# Altium PCB PCB.pcbdoc (part 1 of 2)
Units mm, origin at the board's own origin, x right, y up, seen from the top; angles counter-clockwise.
Board outline 120.52 x 67.35 mm, 2 copper layers (Top Layer, Bottom Layer); 62 components, 40 nets, 228 pads, 79 vias.
Unrouted connection lines stored in the file: 3.
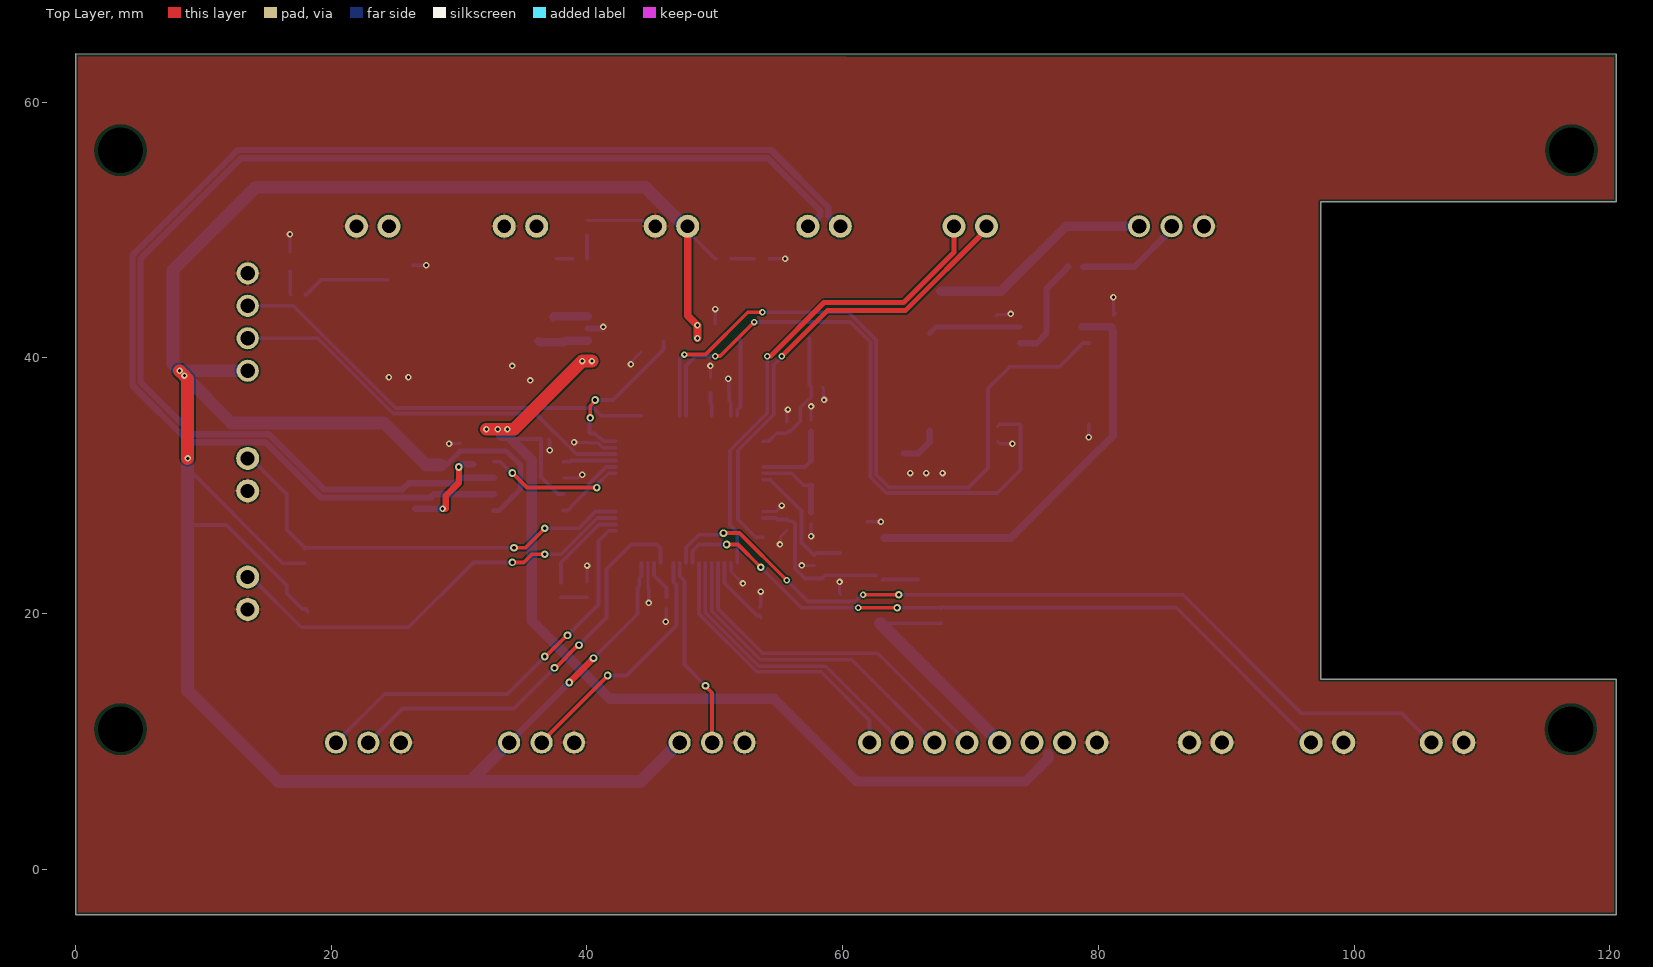
[diagram p0: Top Layer view]
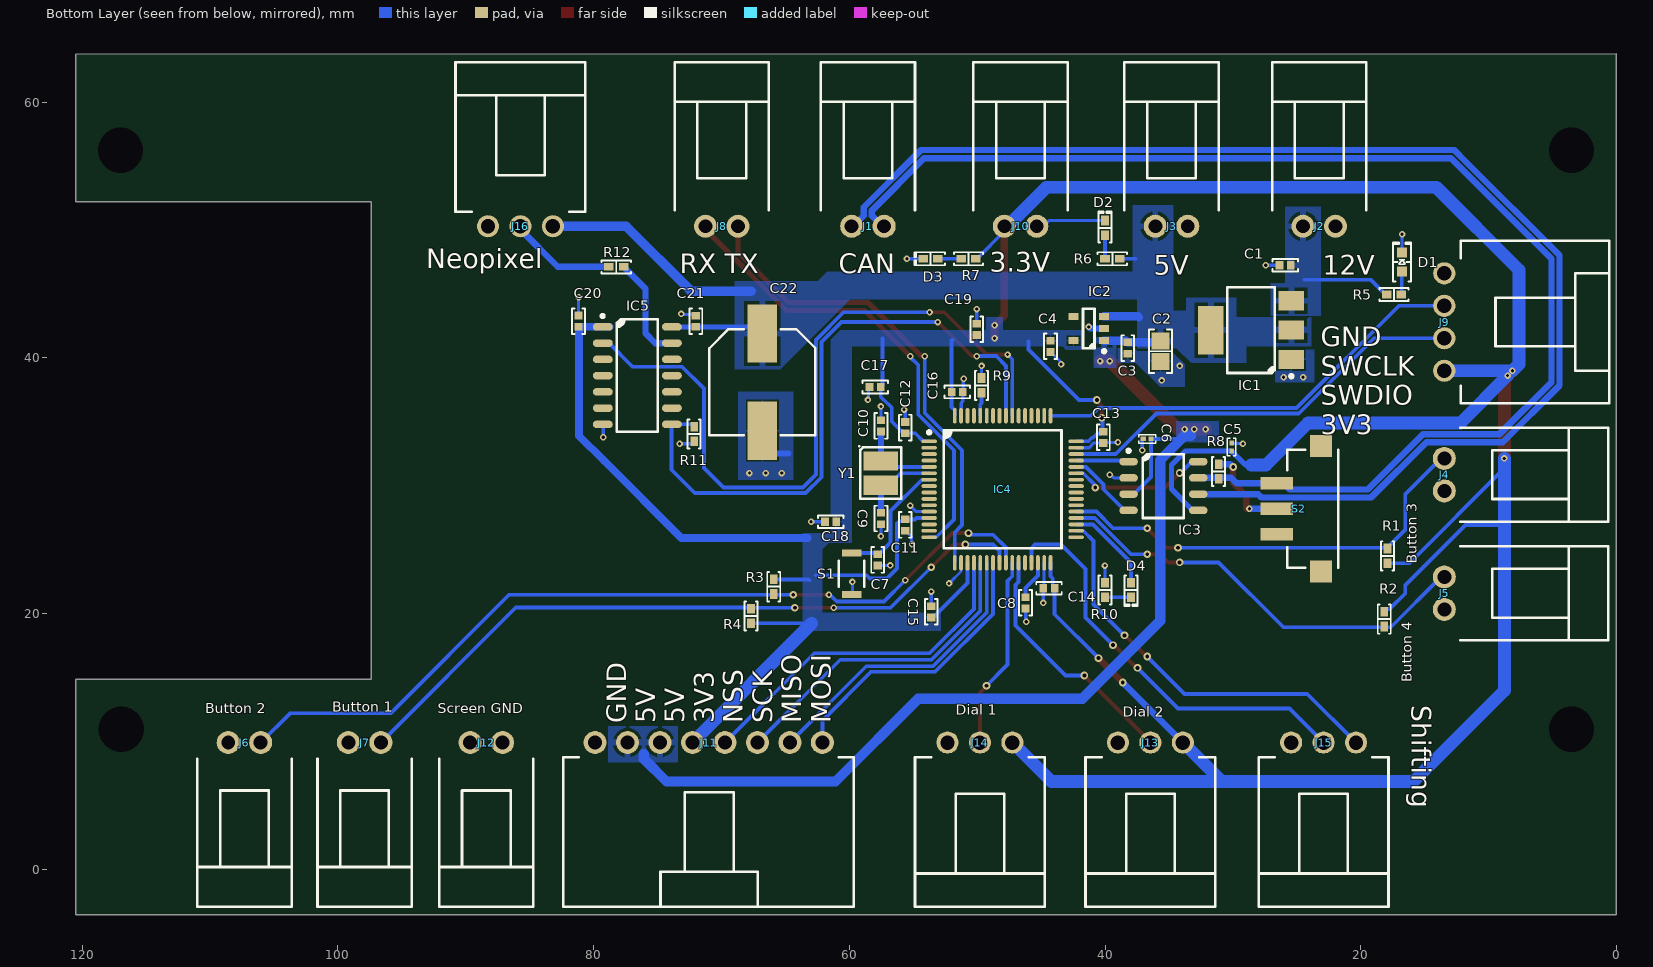
[diagram p1: Bottom Layer view, seen from below]

## Layer stack, top to bottom
Top Solder: solder mask 0.0102, Solder Resist, Dk 3.5
Top Layer: signal copper 0.0356
Dielectric 1: dielectric 0.32, FR-4, Dk 4.8
Bottom Layer: signal copper 0.0356
Bottom Solder: solder mask 0.0102, Solder Resist, Dk 3.5

## Board outline
0,63.796 120.523,63.728 120.523,52.197 97.409,52.197 97.409,14.859 120.523,14.859 120.523,-3.556 0,-3.556

## Design rules (kind name [scope] priority, off if disabled: settings)
BoardOutlineClearance [All] p1: gap=0.2 ignorepadtopadclearanceinfootprint=FALSE
Clearance [All] p1: gap=0.127 ignorepadtopadclearanceinfootprint=TRUE except(0.25: Arc-Hole Track-Hole SMDPad-Hole THPad-Hole Via-Hole Fill-Hole Poly-Hole Region-Hole Text-Hole)
ComponentClearance [All] p1: gap=0.127 collisioncheckmode=3 verticalgap=0.127 showdistances=TRUE
DiffPairsRouting [All] p1: maxlimit=0.254 minlimit=0.127 mostfreqgap=0.127 toplayer_minwidth=0.127 toplayer_maxwidth=25.4 toplayer_prefwidth=0.127 bottomlayer_minwidth=0.127 bottomlayer_maxwidth=25.4 bottomlayer_prefwidth=0.127 substack1={688301AD-FCF4-4EB4-BAFE-FFEB00AE45AE} toplayer_{688301ad-fcf4-4eb4-bafe-ffeb00ae45ae}_minwidth=0.381 toplayer_{688301ad-fcf4-4eb4-bafe-ffeb00ae45ae}_maxwidth=0.381 toplayer_{688301ad-fcf4-4eb4-bafe-ffeb00ae45ae}_prefwidth=0.381 bottomlayer_{688301ad-fcf4-4eb4-bafe-ffeb00ae45ae}_minwidth=0.381 bottomlayer_{688301ad-fcf4-4eb4-bafe-ffeb00ae45ae}_maxwidth=0.381 bottomlayer_{688301ad-fcf4-4eb4-bafe-ffeb00ae45ae}_prefwidth=0.381 substack2={16C61595-261D-4E1B-BAE3-4AC966D508FC} toplayer_{16c61595-261d-4e1b-bae3-4ac966d508fc}_minwidth=0.381 toplayer_{16c61595-261d-4e1b-bae3-4ac966d508fc}_maxwidth=0.381 toplayer_{16c61595-261d-4e1b-bae3-4ac966d508fc}_prefwidth=0.381 bottomlayer_{16c61595-261d-4e1b-bae3-4ac966d508fc}_minwidth=0.381 bottomlayer_{16c61595-261d-4e1b-bae3-4ac966d508fc}_maxwidth=0.381 bottomlayer_{16c61595-261d-4e1b-bae3-4ac966d508fc}_prefwidth=0.381 substack3={7E512655-8A27-4F34-81D1-38BC639BF4BC} toplayer_{7e512655-8a27-4f34-81d1-38bc639bf4bc}_minwidth=0.381 toplayer_{7e512655-8a27-4f34-81d1-38bc639bf4bc}_maxwidth=0.381 toplayer_{7e512655-8a27-4f34-81d1-38bc639bf4bc}_prefwidth=0.381 bottomlayer_{7e512655-8a27-4f34-81d1-38bc639bf4bc}_minwidth=0.381 bottomlayer_{7e512655-8a27-4f34-81d1-38bc639bf4bc}_maxwidth=0.381 bottomlayer_{7e512655-8a27-4f34-81d1-38bc639bf4bc}_prefwidth=0.381 maxuncoupledlength=12.7
Height [All] p1: minheight=0 maxheight=1816.048 prefheight=12.7
HoleSize [All] p1: absolutevalues=TRUE maxlimit=6.3 minlimit=0.254 maxpercent=80.000 minpercent=20.000
HoleToHoleClearance [All] p1: gap=0.25 allowstackedmicrovias=FALSE
MinimumAnnularRing [All] p1: minimumring=0.076
MinimumSolderMaskSliver [All] p1: minsoldermaskwidth=0
PlaneClearance [All] p1: clearance=0.127
PlaneConnect PlaneConnectPowerPads [InPadClass('PowerPads')] p1: planeconnectstyle=Direct reliefexpansion=0.508 reliefentries=4 reliefconductorwidth=0.254 reliefairgap=0.254
PlaneConnect [All] p2: pad.planeconnectstyle=Relief pad.reliefexpansion=0.3 pad.reliefentries=4 pad.reliefconductorwidth=0.127 pad.reliefairgap=0.127 via.planeconnectstyle=Direct via.reliefexpansion=0.3 via.reliefentries=4 via.reliefconductorwidth=0.127 via.reliefairgap=0.127
PolygonConnect PolygonConnectPowerPads [All vs InNet('VCC12V') or InNet('VCC5V')] p1: thpad.connectstyle=Relief thpad.reliefconductorwidth=0.5 thpad.reliefentries=4 thpad.polygonreliefangle="90 Angle" thpad.airgapwidth=0.254 smdpad.connectstyle=Relief smdpad.reliefconductorwidth=0.5 smdpad.reliefentries=4 smdpad.polygonreliefangle="90 Angle" smdpad.airgapwidth=0.254 via.connectstyle=Direct via.reliefconductorwidth=0.254 via.reliefentries=4 via.polygonreliefangle="90 Angle" via.airgapwidth=0.254
PolygonConnect [All] p2: thpad.connectstyle=Relief thpad.reliefconductorwidth=0.25 thpad.reliefentries=4 thpad.polygonreliefangle="90 Angle" thpad.airgapwidth=0.127 smdpad.connectstyle=Relief smdpad.reliefconductorwidth=0.127 smdpad.reliefentries=4 smdpad.polygonreliefangle="90 Angle" smdpad.airgapwidth=0.127 via.connectstyle=Direct via.reliefconductorwidth=0.127 via.reliefentries=4 via.polygonreliefangle="90 Angle" via.airgapwidth=0.127
RoutingVias [All] p1: holewidth=0.3 width=0.6 viastyle="Through Hole" minholewidth=0.254 minwidth=0.508 maxholewidth=0.6 maxwidth=6.6
SilkToSilkClearance [All] p1: silktosilkclearance=0
SilkToSolderMaskClearance [IsPad] p1: minsilkscreentomaskgap=0.1 clearancetoexposedcopper=TRUE
SolderMaskExpansion [All] p1: expansion=0.075 istentingtop=FALSE
Width [All] p1: maxlimit=25.4 minlimit=0.127 preferedwidth=0.127 substack1={688301AD-FCF4-4EB4-BAFE-FFEB00AE45AE} substack2={16C61595-261D-4E1B-BAE3-4AC966D508FC} substack3={7E512655-8A27-4F34-81D1-38BC639BF4BC} minimp=50.000000 maximp=50.000000 favimp=50.000000
20 further rules are at their usual default settings.

## Classes and differential pairs
component class Power: C1 C2 C3 C4 D1 D2 D3 IC1 IC2 R5 R6 R7
component class Neopixel: C20 C21 C22 IC5 J16 R11 R12
component class MCU: C7 C8 C9 C10 C11 C12 C13 C14 C15 C16 C17 C18 C19 D4 IC4 J8 J9 R9 R10 S1 Y1
component class Connectors: J1 J2 J3 J4 J5 J6 J7 J10 J11 J12 J13 J14 J15 R1 R2 R3 R4
component class CAN: C5 C6 IC3 R8 S2
differential pair CAN1: +CAN1_P -CAN1_N

## Components (designator, comment, footprint, x,y, rotation, side; value= is the part's Value field where it differs from the comment)
C1 "0.1µF" "CAP 0402_1005" 25.908,47.244 r180 bottom
C2 "10µF" "CAP 0805_2012" 35.651,40.513 r90 bottom
C3 "1µF" "CAP 0402_1005" 38.227,40.767 r90 bottom
C4 "1µF" "CAP 0402_1005" 44.262,40.894 r90 bottom
C5 "0.1µF" "CAP 0201_0603" 30.099,33.02 r270 bottom
C6 "0.1µF" "CAP 0201_0603" 36.703,33.655 r180 bottom
C7 "0.1µF" "CAP 0402_1005" 57.785,24.189 r90 bottom
C8 "2.2µF" "CAP 0402_1005" 46.228,20.828 r270 bottom
C9 "8pF" "CAP 0402_1005" 57.531,27.432 r90 bottom
C10 "8pF" "CAP 0402_1005" 57.531,34.671 r270 bottom
C11 "0.1µF" "CAP 0402_1005" 55.626,26.924 r90 bottom
C12 "0.1µF" "CAP 0402_1005" 55.626,34.544 r270 bottom
C13 "0.1µF" "CAP 0402_1005" 40.132,33.782 r90 bottom
C14 "0.1µF" "CAP 0402_1005" 44.382,21.971 r180 bottom
C15 "0.1µF" "CAP 0402_1005" 53.594,20.125 r270 bottom
C16 "0.1µF" "CAP 0402_1005" 51.562,37.338 r0 bottom
C17 "1µF" "CAP 0402_1005" 57.98,37.719 r180 bottom
C18 "1µF" "CAP 0402_1005" 61.468,27.178 r180 bottom
C19 "4.7µF" "CAP 0402_1005" 50.038,42.232 r270 bottom
C20 "0.1µF" "CAP 0402_1005" 81.183,42.867 r270 bottom
C21 "0.1µF" "CAP 0402_1005" 72.009,42.858 r270 bottom
C22 "1000µF" "CAP ALSMD 8.3MM H10.5MM" 66.802,38.1 r270 bottom
D1 "Red" "LED 0603_1608 RED" 16.764,47.498 r90 bottom
D2 "Green" "LED 0402_1005 GREEN" 40.005,50.165 r90 bottom
D3 "Yellow" "LED 0402_1005 YELLOW" 53.654,47.752 r0 bottom
D4 "Blue" "LED 0402_1005 BLUE" 37.973,21.844 r270 bottom
IC1 "LD1117S50TR" "ST SOT-223" 28.575,42.164 r0 bottom
IC2 "AP2112K-3.3TRG1" "DIODES SOT-23-5 W5" 41.275,42.291 r0 bottom
IC3 "MCP2542FDT-E/SN" "MICROCHIP SOIC-8 150MIL WIDE" 35.433,29.972 r180 bottom
IC4 "STM32F446RET7" "ST LQFP-64 10X10MM" 48.006,29.718 r180 bottom
IC5 "TXB0104DR" "TI SOIC-14 D" 76.581,38.608 r180 bottom
J1 "0705530106" "MOLEX SDA-70553-2PIN" 58.547,56.261 r180 bottom
J2 "0705530106" "MOLEX SDA-70553-2PIN" 23.241,56.261 r180 bottom
J3 "0705530106" "MOLEX SDA-70553-2PIN" 34.798,56.261 r180 bottom
J4 "0705530106" "MOLEX SDA-70553-2PIN" 7.493,30.861 r270 bottom
J5 "0705530106" "MOLEX SDA-70553-2PIN" 7.493,21.59 r270 bottom
J6 "0705530106" "MOLEX SDA-70553-2PIN" 107.315,3.937 r0 bottom
J7 "0705530106" "MOLEX SDA-70553-2PIN" 97.917,3.937 r0 bottom
J8 "0705530106" "MOLEX SDA-70553-2PIN" 69.977,56.261 r180 bottom
J9 "0705530003" "MOLEX SDA-70553-4PIN" 7.239,42.799 r270 bottom
J10 "0705530106" "MOLEX SDA-70553-2PIN" 46.609,56.261 r180 bottom
J11 "0705530007" "MOLEX SDA-70553-8PIN" 71,3.683 r0 bottom
J12 "0705530106" "MOLEX SDA-70553-2PIN" 88.392,3.937 r0 bottom
J13 "0705530002" "MOLEX SDA-70553-3PIN" 36.449,3.683 r0 bottom
J14 "0705530002" "MOLEX SDA-70553-3PIN" 49.784,3.683 r0 bottom
J15 "0705530002" "MOLEX SDA-70553-3PIN" 22.907,3.683 r0 bottom
J16 "0705530002" "MOLEX SDA-70553-3PIN" 85.725,56.515 r180 bottom
R1 "10 kOhms" "RES 0402_1005" 17.907,24.511 r270 bottom
R2 "10 kOhms" "RES 0402_1005" 18.161,19.558 r90 bottom
R3 "10 kOhms" "RES 0402_1005" 65.913,22.098 r90 bottom
R4 "10 kOhms" "RES 0402_1005" 67.691,19.812 r270 bottom
R5 "1.8 kOhms" "RES 0402_1005" 17.399,44.958 r180 bottom
R6 "340 Ohms" "RES 0402_1005" 39.43,47.752 r180 bottom
R7 "220 Ohms" "RES 0402_1005" 50.673,47.752 r180 bottom
R8 "120 Ohms" "RES 0402_1005" 31.115,31.115 r90 bottom
R9 "10 kOhms" "RES 0402_1005" 49.657,37.846 r270 bottom
R10 "220 Ohms" "RES 0402_1005" 40.005,21.844 r90 bottom
R11 "10 kOhms" "RES 0402_1005" 72.136,34.036 r90 bottom
R12 "470 Ohms" "RES 0402_1005" 78.232,47.117 r0 bottom
S1 "KXT341 LHS" "C&K KXT3" 59.817,23.114 r90 bottom
S2 "SS312SAH4" "NKK SS312SAH4" 23.749,28.194 r0 bottom
Y1 "8MHz" "NDK NX3225GD" 57.531,30.988 r270 bottom

## Footprints (in the part's own frame and the unit in brackets; to place one, negate y for a bottom-side part, rotate by r counter-clockwise, add the part's x,y. Pads: shape width x height; smd on the part's side, far side on the other; paste and mask are expansions set on the pad)
"C&K KXT3" [mm]
  rect 0.55x1.5 smd: 1(-1.625,0) 2(1.625,0)
  silkscreen extent -1,-1 1,1, body extent -1.75,-1 1.75,1, height 0.58
"CAP 0201_0603" [mm] "Chip Capacitor, 2-Leads, Body 0.60x0.30mm, IPC Medium Density"
  rect 0.4x0.35 smd: 1(-0.31,0) 2(0.31,0)
  silkscreen extent -0.67,-0.33 0.67,0.33, body extent -0.3,-0.15 0.3,0.15, height 0.3
"CAP 0402_1005" [mm] "Chip Capacitor, 2-Leads, Body 1.02x0.51mm, IPC Medium Density"
  rect 0.6x0.64 smd: 1(-0.44,0) 2(0.44,0)
  silkscreen extent -1,-0.5 1,0.5, body extent -0.5,-0.26 0.5,0.26, height 0.52
"CAP 0805_2012" [mm] "Chip Capacitor, 2-Leads, Body 2.00x1.20mm, IPC Medium Density"
  rect 1.3x1.4 smd: 1(-0.8,0) 2(0.8,0)
  silkscreen extent -1.7,-0.9 1.7,0.9, body extent -1,-0.64 1,0.64, height 1.26
"CAP ALSMD 8.3MM H10.5MM" [mm] "Aluminum Electrolytic Capacitor, Body 8.30x8.30x10.50mm, IPC Low Density"
  rect 4.55x2.3 smd: 1(-3.8,0) 2(3.8,0)
  silkscreen extent -4.15,-4.15 4.15,4.15, body extent -4.95,-4.15 4.95,4.15, height 10.5
"DIODES SOT-23-5 W5" [mm] "SOT23, 5-Leads, Body 3.00x2.85mm, Pitch 0.95mm, IPC Medium Density"
  rect 0.8x0.55 smd: 1(-1.2,0.95) 2(-1.2,0) 3(-1.2,-0.95) 4(1.2,-0.95) 5(1.2,0.95)
  silkscreen extent -1.32,-1.55 0.45,1.9, body extent -1.41,-1.45 1.41,1.45, height 1.5
"LED 0402_1005 BLUE" [mm] "Chip Diode, 2-Leads, Body 1.00x0.50mm, IPC Medium Density"
  rect 0.75x0.6 smd: 1(-0.575,0) 2(0.575,0)
  silkscreen extent -1.14,-0.51 1.27,0.51, body extent -0.5,-0.25 0.5,0.25, height 0.21
"LED 0402_1005 GREEN" [mm] "Chip Diode, 2-Leads, Body 1.00x0.50mm, IPC Medium Density"
  rect 0.75x0.6 smd: 1(-0.575,0) 2(0.575,0)
  silkscreen extent -1.14,-0.51 1.27,0.51, body extent -0.5,-0.25 0.5,0.25, height 0.21
"LED 0402_1005 YELLOW" [mm] "Chip Diode, 2-Leads, Body 1.00x0.50mm, IPC Medium Density"
  rect 0.75x0.6 smd: 1(-0.575,0) 2(0.575,0)
  silkscreen extent -1.14,-0.51 1.27,0.51, body extent -0.5,-0.25 0.5,0.25, height 0.21
"LED 0603_1608 RED" [mm] "Chip Diode, 2-Leads, Body 1.60x0.80mm, IPC Medium Density"
  rect 0.8x0.8 smd: 1(-0.75,0) 2(0.75,0)
  silkscreen extent -1.52,-0.7 1.52,0.7, body extent -0.8,-0.4 0.8,0.4, height 0.53
"MICROCHIP SOIC-8 150MIL WIDE" [mm] "SOIC, 8-Leads, Body 4.90x3.90mm, Pitch 1.27mm, IPC Medium Density"
  oval 1.45x0.6 smd: 1(-2.725,1.905) 2(-2.725,0.635) 3(-2.725,-0.635) 4(-2.725,-1.905) 5(2.725,-1.905) 6(2.725,-0.635) 7(2.725,0.635) 8(2.725,1.905)
  silkscreen extent -2.85,-2.5 1.6,2.88, body extent -3.01,-2.45 3.01,2.45, height 1.5
"MOLEX SDA-70553-2PIN" [mm] "SL Right angle header with latch, 0.100 centres, SDA-70553"
  round 1.8 hole 1.09: 1(-1.27,-5.969) 2(1.27,-5.969)
  silkscreen extent -3.68,-4.72 3.68,6.86, body extent -3.68,-6.72 3.68,6.87, height 6.96
"MOLEX SDA-70553-3PIN" [mm] "SL Right Angle Header W/LAtch & Trip-Pegs 2.54mm Centres"
  round 1.73 hole 1.13: 1(-2.54,-6.223) 2(0,-6.223) 3(2.54,-6.223)
  silkscreen extent -5.08,-5.08 5.08,6.6, body extent -5.08,-6.92 5.08,6.67, height 6.98
"MOLEX SDA-70553-4PIN" [mm] "SL Right Angle Header W/LAtch & Trip-Pegs 2.54mm Centres"
  round 1.73 hole 1.13: 1(-3.81,-6.223) 2(-1.27,-6.223) 3(1.27,-6.223) 4(3.81,-6.223)
  silkscreen extent -6.35,-4.95 6.35,6.68, body extent -6.35,-6.92 6.35,6.67, height 6.98
"MOLEX SDA-70553-8PIN" [mm] "SL Right angle header with latch, 0.100 centres, SDA-70553"
  round 1.8 hole 1.09: 1(-8.89,-6.223) 2(-6.35,-6.223) 3(-3.81,-6.223) 4(-1.27,-6.223) 5(1.27,-6.223) 6(3.81,-6.223) 7(6.35,-6.223) 8(8.89,-6.223)
  silkscreen extent -11.34,-5.08 11.39,6.6, body extent -11.39,-6.97 11.47,6.62, height 6.96
"NDK NX3225GD" [mm] "Crystal, 2-Leads, Body 2.50x3.20mm"
  rect 1.5x2.7 smd: 1(-0.95,0) 2(0.95,0)
  silkscreen extent -2.15,-1.75 2,1.6, body extent -1.6,-1.25 1.6,1.25, height 1
"NKK SS312SAH4" [mm]
  rect 2.55x1 smd: 1(2.825,-2) 2(2.825,0) 3(2.825,2)
  rect 1.7x1.7 smd: M(-0.65,-4.9) M(-0.65,4.9)
  silkscreen extent -2,-4.6 2,4.6, body extent -3.98,-5.25 3.42,5.25, height 2.9
"RES 0402_1005" [mm] "Chip Resistor, 2-Leads, Body 1.0x0.5mm, IPC Medium Density"
  rect 0.75x0.6 smd: 1(-0.575,0) 2(0.575,0)
  silkscreen extent -1.14,-0.51 1.14,0.51, body extent -0.5,-0.25 0.5,0.25, height 0.35
"ST LQFP-64 10X10MM" [mm] "LQFP, 64-Leads, Body 10.00x10.00mm, Pitch 0.50mm, IPC Medium Density"
  oval 1.2x0.3 smd: 1(-5.75,3.75) 2(-5.75,3.25) 3(-5.75,2.75) 4(-5.75,2.25) 5(-5.75,1.75) 6(-5.75,1.25) 7(-5.75,0.75) 8(-5.75,0.25) 9(-5.75,-0.25) 10(-5.75,-0.75) 11(-5.75,-1.25) 12(-5.75,-1.75) 13(-5.75,-2.25) 14(-5.75,-2.75) 15(-5.75,-3.25) 16(-5.75,-3.75) 33(5.75,-3.75) 34(5.75,-3.25) 35(5.75,-2.75) 36(5.75,-2.25) 37(5.75,-1.75) 38(5.75,-1.25) 39(5.75,-0.75) 40(5.75,-0.25) 41(5.75,0.25) 42(5.75,0.75) 43(5.75,1.25) 44(5.75,1.75) 45(5.75,2.25) 46(5.75,2.75) 47(5.75,3.25) 48(5.75,3.75)
  oval 0.3x1.2 smd: 17(-3.75,-5.75) 18(-3.25,-5.75) 19(-2.75,-5.75) 20(-2.25,-5.75) 21(-1.75,-5.75) 22(-1.25,-5.75) 23(-0.75,-5.75) 24(-0.25,-5.75) 25(0.25,-5.75) 26(0.75,-5.75) 27(1.25,-5.75) 28(1.75,-5.75) 29(2.25,-5.75) 30(2.75,-5.75) 31(3.25,-5.75) 32(3.75,-5.75) 49(3.75,5.75) 50(3.25,5.75) 51(2.75,5.75) 52(2.25,5.75) 53(1.75,5.75) 54(1.25,5.75) 55(0.75,5.75) 56(0.25,5.75) 57(-0.25,5.75) 58(-0.75,5.75) 59(-1.25,5.75) 60(-1.75,5.75) 61(-2.25,5.75) 62(-2.75,5.75) 63(-3.25,5.75) 64(-3.75,5.75)
  silkscreen extent -5.88,-4.6 4.6,4.6, body extent -6.01,-6.01 6.01,6.01, height 1.6
"ST SOT-223" [mm] "SOT223, 4-Leads, Body 6.50x7.00mm (avg), Pitch 2.30mm, IPC Medium Density"
  rect 2x1.5 smd: 1(-3.15,2.3) 2(-3.15,0) 3(-3.15,-2.3)
  rect 2x3.8 smd: 4(3.15,0)
  silkscreen extent -3.27,-3.35 1.85,3.72, body extent -3.52,-3.25 3.5,3.25, height 1.8
"TI SOIC-14 D" [mm] "SOP, 14-Leads, Body 8.65x3.90mm, Pitch 1.27mm, IPC Medium Density"
  oval 1.55x0.6 smd: 1(-2.7,3.81) 2(-2.7,2.54) 3(-2.7,1.27) 4(-2.7,0) 5(-2.7,-1.27) 6(-2.7,-2.54) 7(-2.7,-3.81) 8(2.7,-3.81) 9(2.7,-2.54) 10(2.7,-1.27) 11(2.7,0) 12(2.7,1.27) 13(2.7,2.54) 14(2.7,3.81)
  silkscreen extent -2.85,-4.4 1.6,4.78, body extent -3.01,-4.32 3.01,4.32, height 1.65

## Part data
C1: library part CGA2B3X5R1H104M050BB, "CAP CER 0.1UF 50V X5R 0402", Device Package="0402 (1005 Metric)", Manufacturer="TDK Corporation", Operating temperature="-55°C ~ 85°C", Ratings=AEC-Q200, Supplier Part Number 1=445-12214-1-ND, Temperature Coefficient=X5R, Tolerance=±20%, Voltage - Rated=50V, Applications=Automotive, Capacitance=0.1µF, ComponentLink1Description=Datasheet, ComponentLink1URL=https://product.tdk.com/info/en/catalog/datasheets/mlcc_automotive_general_en.pdf?ref_disty=digikey, ComponentLink2Description="DigiKey Link", ComponentLink2URL=http://digikey.com/product-detail/en/tdk-corporation/CGA2B3X5R1H104M050BB/445-12214-1-ND/3953880, LastUpdated="2020-09-02 1:02:25 AM", Lifecycle Status=Active, Minimum Order=1, Mounting Type="Surface Mount, MLCC", Package / Case="0402 (1005 Metric)", Packaging=TapeAndReel, Part Number=CGA2B3X5R1H104M050BB, Part Status=Active, PartId=1792, Price=0.02, Series=CGA, Size / Dimension="0.039\" L x 0.020\" W (1.00mm x 0.50mm)", Supplier 1=DigiKey, Thickness (Max)="0.022\" (0.55mm)"
C2: library part GRM21BC81E106ME51L, "CAP CER 10UF 25V X6S 0805", Device Package="0805 (2012 Metric)", Manufacturer="Murata Electronics", Operating temperature="-55°C ~ 105°C", Supplier Part Number 1=490-10503-1-ND, Temperature Coefficient=X6S, Tolerance=±20%, Voltage - Rated=25V, Applications="General Purpose", Capacitance=10µF, ComponentLink1Description=Datasheet, ComponentLink1URL=https://search.murata.co.jp/Ceramy/image/img/A01X/G101/ENG/GRM21BC81E106ME51-01.pdf, ComponentLink2Description="DigiKey Link", ComponentLink2URL=http://digikey.com/product-detail/en/murata-electronics/GRM21BC81E106ME51L/490-10503-1-ND/5026431, LastUpdated="2020-09-02 1:04:38 AM", Lifecycle Status=Active, Minimum Order=1, Mounting Type="Surface Mount, MLCC", Package / Case="0805 (2012 Metric)", Packaging=TapeAndReel, Part Number=GRM21BC81E106ME51L, Part Status=Active, PartId=4560, Price=0.07, Series=GRM, Size / Dimension="0.079\" L x 0.049\" W (2.00mm x 1.25mm)", Supplier 1=DigiKey, Thickness (Max)="0.055\" (1.40mm)"
C3 C4: library part 0402ZD105KAT4A, "CAP CER 1UF 10V X5R 0402", Device Package="0402 (1005 Metric)", Manufacturer="AVX Corporation", Operating temperature="-55°C ~ 85°C", Supplier Part Number 1=478-10063-1-ND, Temperature Coefficient=X5R, Tolerance=±10%, Voltage - Rated=10V, Applications="General Purpose", Capacitance=1µF, ComponentLink1Description=Datasheet, ComponentLink1URL=http://datasheets.avx.com/cx5r.pdf, ComponentLink2Description="DigiKey Link", ComponentLink2URL=http://digikey.com/product-detail/en/avx-corporation/0402ZD105KAT4A/478-10063-1-ND/6564285, LastUpdated="2020-09-02 1:02:25 AM", Lifecycle Status=Active, Minimum Order=1, Mounting Type="Surface Mount, MLCC", Package / Case="0402 (1005 Metric)", Packaging=TapeAndReel, Part Number=0402ZD105KAT4A, Part Status=Active, PartId=1846, Price=0.02, Series=-, Size / Dimension="0.039\" L x 0.020\" W (1.00mm x 0.50mm)", Supplier 1=DigiKey, Thickness (Max)="0.022\" (0.56mm)"
C5 C6: library part EMK063BJ104KP-F, "CAP CER 0.1UF 16V X5R 0201", Device Package="0201 (0603 Metric)", Manufacturer="Taiyo Yuden", Operating temperature="-55°C ~ 85°C", Supplier Part Number 1=587-5833-1-ND, Temperature Coefficient=X5R, Tolerance=±10%, Voltage - Rated=16V, Applications="General Purpose", Capacitance=0.1µF, ComponentLink1Description=Datasheet, ComponentLink1URL="https://ds.yuden.co.jp/TYCOMPAS/ut/detail?pn=EMK063BJ104KP-F  &u=M", ComponentLink2Description="DigiKey Link", ComponentLink2URL=http://digikey.com/product-detail/en/taiyo-yuden/EMK063BJ104KP-F/587-5833-1-ND/7674954, LastUpdated="2020-09-02 1:00:18 AM", Lifecycle Status=Active, Minimum Order=1, Mounting Type="Surface Mount, MLCC", Package / Case="0201 (0603 Metric)", Packaging=TapeAndReel, Part Number=EMK063BJ104KP-F, Part Status=Active, PartId=12, Price=0.02, Series=M, Size / Dimension="0.024\" L x 0.012\" W (0.60mm x 0.30mm)", Supplier 1=DigiKey, Thickness (Max)="0.013\" (0.33mm)"
C7 C11 C12 C13 C14 C15 C16 C20 C21: library part C0402C104K4RECAUTO, "CAP CER 0402 0.1UF 16V X7R 10%", Device Package="0402 (1005 Metric)", Manufacturer=KEMET, Operating temperature="-55°C ~ 125°C", Ratings=AEC-Q200, Supplier Part Number 1=399-17167-1-ND, Temperature Coefficient=X7R, Tolerance=±10%, Voltage - Rated=16V, Applications="Automotive, ESD Protection", Capacitance=0.1µF, ComponentLink1Description=Datasheet, ComponentLink1URL=https://api.kemet.com/component-edge/download/datasheet/C0402C104K4RECAUTO.pdf, ComponentLink2Description="DigiKey Link", ComponentLink2URL=http://digikey.com/product-detail/en/kemet/C0402C104K4RECAUTO/399-17167-1-ND/8563708, LastUpdated="2020-09-02 1:02:25 AM", Lifecycle Status=Active, Minimum Order=1, Mounting Type="Surface Mount, MLCC", Package / Case="0402 (1005 Metric)", Packaging=TapeAndReel, Part Number=C0402C104K4RECAUTO, Part Status=Active, PartId=1731, Price=0.02, Series="ESD SMD Auto X7R", Size / Dimension="0.039\" L x 0.020\" W (1.00mm x 0.50mm)", Supplier 1=DigiKey, Thickness (Max)="0.022\" (0.55mm)"
C8: library part CL05A225KO5NQNC, "CAP CER 2.2UF 16V X5R 0402", Device Package="0402 (1005 Metric)", Manufacturer="Samsung Electro-Mechanics", Operating temperature="-55°C ~ 85°C", Supplier Part Number 1=1276-1461-1-ND, Temperature Coefficient=X5R, Tolerance=±10%, Voltage - Rated=16V, Applications="General Purpose", Capacitance=2.2µF, ComponentLink1Description=Datasheet, ComponentLink1URL=http://www.samsungsem.com/kr/support/product-search/mlcc/CL05A225KO5NQNC.jsp, ComponentLink2Description="DigiKey Link", ComponentLink2URL=http://digikey.com/product-detail/en/samsung-electro-mechanics/CL05A225KO5NQNC/1276-1461-1-ND/3889547, LastUpdated="2020-09-02 1:02:25 AM", Lifecycle Status=Active, Minimum Order=1, Mounting Type="Surface Mount, MLCC", Package / Case="0402 (1005 Metric)", Packaging=TapeAndReel, Part Number=CL05A225KO5NQNC, Part Status=Active, PartId=1761, Price=0.10, Series=CL, Size / Dimension="0.039\" L x 0.020\" W (1.00mm x 0.50mm)", Supplier 1=DigiKey, Thickness (Max)="0.022\" (0.55mm)"
C9 C10: library part C1005NP01H080D050BA, "CAP CER 8PF 50V NP0 0402", Device Package="0402 (1005 Metric)", Manufacturer="TDK Corporation", Operating temperature="-55°C ~ 150°C", Supplier Part Number 1=445-13781-1-ND, Temperature Coefficient="C0G, NP0", Tolerance=±0.5pF, Voltage - Rated=50V, Applications="General Purpose", Capacitance=8pF, ComponentLink1Description=Datasheet, ComponentLink1URL=https://product.tdk.com/info/en/catalog/datasheets/mlcc_commercial_hightemp_en.pdf?ref_disty=digikey, ComponentLink2Description="DigiKey Link", ComponentLink2URL=http://digikey.com/product-detail/en/tdk-corporation/C1005NP01H080D050BA/445-13781-1-ND/3955447, Features="High Temperature", LastUpdated="2020-09-02 1:02:24 AM", Lifecycle Status=Active, Minimum Order=1, Mounting Type="Surface Mount, MLCC", Package / Case="0402 (1005 Metric)", Packaging=TapeAndReel, Part Number=C1005NP01H080D050BA, Part Status=Active, PartId=2033, Price=0.01, Series=C, Size / Dimension="0.039\" L x 0.020\" W (1.00mm x 0.50mm)", Supplier 1=DigiKey, Thickness (Max)="0.022\" (0.55mm)"
C17 C18: library part CGB2A1X5R1A105K033BC, "CAP CER 1UF 10V X5R 0402", Device Package="0402 (1005 Metric)", Manufacturer="TDK Corporation", Operating temperature="-55°C ~ 85°C", Supplier Part Number 1=445-13179-1-ND, Temperature Coefficient=X5R, Tolerance=±10%, Voltage - Rated=10V, Applications="General Purpose", Capacitance=1µF, ComponentLink1Description=Datasheet, ComponentLink1URL=https://product.tdk.com/info/en/catalog/datasheets/mlcc_commercial_lowprofile_en.pdf?ref_disty=digikey, ComponentLink2Description="DigiKey Link", ComponentLink2URL=http://digikey.com/product-detail/en/tdk-corporation/CGB2A1X5R1A105K033BC/445-13179-1-ND/3954845, Features="Low Profile", LastUpdated="2020-09-02 1:02:25 AM", Lifecycle Status=Active, Minimum Order=1, Mounting Type="Surface Mount, MLCC", Package / Case="0402 (1005 Metric)", Packaging=TapeAndReel, Part Number=CGB2A1X5R1A105K033BC, Part Status=Active, PartId=1796, Price=0.02, Series=CGB, Size / Dimension="0.039\" L x 0.020\" W (1.00mm x 0.50mm)", Supplier 1=DigiKey, Thickness (Max)="0.013\" (0.33mm)"
C19: library part C1005X5R1A475K050BC, "CAP CER 4.7UF 10V X5R 0402", Device Package="0402 (1005 Metric)", Manufacturer="TDK Corporation", Operating temperature="-55°C ~ 85°C", Supplier Part Number 1=445-13820-1-ND, Temperature Coefficient=X5R, Tolerance=±10%, Voltage - Rated=10V, Applications="General Purpose", Capacitance=4.7µF, ComponentLink1Description=Datasheet, ComponentLink1URL=https://product.tdk.com/info/en/catalog/datasheets/mlcc_commercial_general_en.pdf?ref_disty=digikey, ComponentLink2Description="DigiKey Link", ComponentLink2URL=http://digikey.com/product-detail/en/tdk-corporation/C1005X5R1A475K050BC/445-13820-1-ND/3955486, Features="Low ESL", LastUpdated="2020-09-02 1:02:25 AM", Lifecycle Status=Active, Minimum Order=1, Mounting Type="Surface Mount, MLCC", Package / Case="0402 (1005 Metric)", Packaging=TapeAndReel, Part Number=C1005X5R1A475K050BC, Part Status=Active, PartId=1759, Price=0.10, Series=C, Size / Dimension="0.039\" L x 0.020\" W (1.00mm x 0.50mm)", Supplier 1=DigiKey, Thickness (Max)="0.022\" (0.55mm)"
C22: library part EEE-FT1A102AP, "CAP ALUM 1000UF 20% 10V SMD", Device Package="Radial, Can - SMD", ESR (Equivalent Series Resistance)="80mOhm @ 100kHz", Lifetime @ Temp.="2000 Hrs @ 105°C", Manufacturer="Panasonic Electronic Components", Operating temperature="-55°C ~ 105°C", Ratings=AEC-Q200, Ripple Current @ High Frequency="850mA @ 100kHz", Ripple Current @ Low Frequency="595mA @ 120Hz", Supplier Part Number 1=P15081CT-ND, Tolerance=±20%, Voltage - Rated=10V, Applications=Automotive, Capacitance=1000µF, ComponentLink1Description=Datasheet, ComponentLink1URL=https://na.industrial.panasonic.com/file-download/3112, ComponentLink2Description="DigiKey Link", ComponentLink2URL=http://digikey.com/product-detail/en/panasonic-electronic-components/EEE-FT1A102AP/P15081CT-ND/2796921, Height - Seated (Max)="0.413\" (10.50mm)", LastUpdated="2020-09-02 1:25:16 AM", Lifecycle Status=Active, Minimum Order=1, Mounting Type="Surface Mount", Package / Case="Radial, Can - SMD", Packaging=TapeAndReel, Part Number=EEE-FT1A102AP, Part Status=Active, PartId=7500, Polarization=Polar, Price=0.33, Series=FT, Size / Dimension="0.315\" Dia (8.00mm)", Supplier 1=DigiKey, Surface Mount Land Size="0.327\" L x 0.327\" W (8.30mm x 8.30mm)"
D1: library part SML-LXIL0603SIC-TR, "1.64X0.84X1.15MM TOP VIEW SMT LE", Current - Test=20mA, Device Package="0603 (1608 Metric)", Lens Color=Colorless, Manufacturer="Lumex Opto/Components Inc.", Millicandela Rating=1600mcd, Supplier Part Number 1=67-2333-1-ND, Voltage - Forward (Vf) (Typ)=2.1V, Color=Red, ComponentLink1Description=Datasheet, ComponentLink1URL=https://www.lumex.com/spec/SML-LXIL0603SIC-TR.pdf, ComponentLink2Description="DigiKey Link", ComponentLink2URL=http://digikey.com/product-detail/en/lumex-opto-components-inc/SML-LXIL0603SIC-TR/67-2333-1-ND/9866812, Height (Max)=1.40mm, LastUpdated="2020-09-02 1:20:56 AM", Lens Size="0.79mm Dia", Lens Style="Round with Domed Top", Lens Transparency=Clear, Lifecycle Status=Active, Minimum Order=1, Mounting Type="Surface Mount", Package / Case="0603 (1608 Metric)", Packaging=TapeAndReel, Part Number=SML-LXIL0603SIC-TR, Part Status=Active, PartId=406, Price=0.19, Series=-, Size / Dimension="1.64mm L x 0.84mm W", Supplier 1=DigiKey, Viewing Angle=75°, Wavelength - Peak=630nm
D2: library part EAST10052GA0, "LED GREEN CLEAR 2SMD", Current - Test=5mA, Device Package="0402 (1005 Metric)", Lens Color=Colorless, Manufacturer="Everlight Electronics Co Ltd", Supplier Device Package=2-SMD, Supplier Part Number 1=1080-1557-1-ND, Voltage - Forward (Vf) (Typ)=2.95V, Color=Green, ComponentLink1Description=Datasheet, ComponentLink1URL=https://everlightamericas.com/index.php?controller=attachment&id_attachment=3256, ComponentLink2Description="DigiKey Link", ComponentLink2URL=http://digikey.com/product-detail/en/everlight-electronics-co-ltd/EAST10052GA0/1080-1557-1-ND/8510385, Configuration=Standard, Height (Max)=0.25mm, LastUpdated="2020-09-02 1:20:38 AM", Lens Size="1.00mm x 0.50mm", Lens Style="Rectangle with Flat Top", Lens Transparency=Clear, Lifecycle Status=Active, Minimum Order=1, Mounting Type="Surface Mount", Package / Case="0402 (1005 Metric)", Packaging=TapeAndReel, Part Number=EAST10052GA0, Part Status=Active, PartId=696, Price=0.08, Series=-, Size / Dimension="1.00mm L x 0.50mm W", Supplier 1=DigiKey, Viewing Angle=120°, Wavelength - Peak=518nm
D3: library part APG1005SYC-T, "LED YELLOW CLEAR CHIP SMD", Current - Test=20mA, Device Package="0402 (1005 Metric)", Lens Color=Colorless, Manufacturer=Kingbright, Millicandela Rating=100mcd, Supplier Device Package="Chip LED", Supplier Part Number 1=754-1809-1-ND, Voltage - Forward (Vf) (Typ)=2.05V, Color=Yellow, ComponentLink1Description=Datasheet, ComponentLink1URL=http://www.kingbrightusa.com/images/catalog/SPEC/APG1005SYC-T.pdf, ComponentLink2Description="DigiKey Link", ComponentLink2URL=http://digikey.com/product-detail/en/kingbright/APG1005SYC-T/754-1809-1-ND/4764945, Configuration=Standard, Height (Max)=0.25mm, LastUpdated="2020-09-02 1:21:13 AM", Lens Size="0.60mm x 0.50mm", Lens Style="Rectangle with Flat Top", Lens Transparency=Clear, Lifecycle Status=Active, Minimum Order=1, Mounting Type="Surface Mount", Package / Case="0402 (1005 Metric)", Packaging=TapeAndReel, Part Number=APG1005SYC-T, Part Status=Active, PartId=173, Price=0.10, Series=-, Size / Dimension="1.00mm L x 0.50mm W", Supplier 1=DigiKey, Viewing Angle=120°, Wavelength - Dominant=589nm, Wavelength - Peak=591nm
D4: library part APHHS1005QBC/D, "LED BLUE CLEAR CHIP SMD", Current - Test=20mA, Device Package="0402 (1005 Metric)", Lens Color=Colorless, Manufacturer=Kingbright, Millicandela Rating=60mcd, Supplier Device Package="Chip LED", Supplier Part Number 1=754-1504-1-ND, Voltage - Forward (Vf) (Typ)=3.3V, Color=Blue, ComponentLink1Description=Datasheet, ComponentLink1URL=http://www.kingbrightusa.com/images/catalog/SPEC/APHHS1005QBC-D.pdf, ComponentLink2Description="DigiKey Link", ComponentLink2URL=http://digikey.com/product-detail/en/kingbright/APHHS1005QBC-D/754-1504-1-ND/2263581, Configuration=Standard, Height (Max)=0.60mm, LastUpdated="2020-09-02 1:20:21 AM", Lens Size="0.80mm x 0.50mm", Lens Style="Rectangle with Flat Top", Lens Transparency=Clear, Lifecycle Status=Active, Minimum Order=1, Mounting Type="Surface Mount", Package / Case="0402 (1005 Metric)", Packaging=TapeAndReel, Part Number=APHHS1005QBC/D, Part Status=Active, PartId=862, Price=0.13, Series=-, Size / Dimension="1.00mm L x 0.50mm W", Supplier 1=DigiKey, Viewing Angle=120°, Wavelength - Dominant=465nm, Wavelength - Peak=460nm
IC1: "IC REG LINEAR 5V 800MA SOT223", Current - Output=800mA, Current - Quiescent (Iq)=10mA, Manufacturer=STMicroelectronics, Package / Case="TO-261-4, TO-261AA", Supplier Device Package=SOT-223, Supplier Part Number 1=497-6447-1-ND, Voltage - Input (Max)=15V, Voltage - Output (Min/Fixed)=5V, Voltage Dropout (Max)="1.2V @ 800mA", ComponentLink1Description=Datasheet, ComponentLink1URL=http://www.st.com/content/ccc/resource/technical/document/datasheet/99/3b/7d/91/91/51/4b/be/CD00000544.pdf/files/CD00000544.pdf/jcr:content/translations/en.CD00000544.pdf, ComponentLink2Description="DigiKey Link", ComponentLink2URL=http://digikey.com/product-detail/en/stmicroelectronics/LD1117S50TR/497-6447-1-ND/1865475, LastUpdated="2020-09-02 1:24:39 AM", Lifecycle Status=Active, Minimum Order=1, Mounting Type="Surface Mount", Number of Regulators=1, Output Configuration=Positive, Output Type=Fixed, Packaging=TapeAndReel, Part Number=LD1117S50TR, Part Status=Active, Price=0.14, Protection Features="Over Current, Over Temperature", PSRR="75dB (120Hz)", Series=-, Supplier 1=DigiKey
IC2: "IC REG LINEAR 3.3V 600MA SOT25", Current - Output=600mA, Current - Quiescent (Iq)=80µA, Manufacturer="Diodes Incorporated", Operating temperature="-40°C ~ 85°C", Package / Case="SC-74A, SOT-753", Supplier Device Package=SOT-25, Supplier Part Number 1=AP2112K-3.3TRG1DICT-ND, Voltage - Input (Max)=6V, Voltage - Output (Min/Fixed)=3.3V, Voltage Dropout (Max)="0.4V @ 600mA", ComponentLink1Description=Datasheet, ComponentLink1URL=https://www.diodes.com/assets/Datasheets/AP2112.pdf, ComponentLink2Description="DigiKey Link", ComponentLink2URL=http://digikey.com/product-detail/en/diodes-incorporated/AP2112K-3.3TRG1/AP2112K-3.3TRG1DICT-ND/4505257, Control Features=Enable, LastUpdated="2020-09-02 1:25:56 AM", Lifecycle Status=Active, Minimum Order=1, Mounting Type="Surface Mount", Number of Regulators=1, Output Configuration=Positive, Output Type=Fixed, Packaging=TapeAndReel, Part Number=AP2112K-3.3TRG1, Part Status=Active, Price=0.10, Protection Features="Over Current, Over Temperature", PSRR="65sB (100Hz ~ 1KHz)", Series=-, Supplier 1=DigiKey
IC3: "IC TRANSCEIVER 1/1 8SOIC", Device Package="8-SOIC (0.154\", 3.90mm Width)", Manufacturer="Microchip Technology", Operating temperature="-40°C ~ 125°C", Supplier Device Package=8-SOIC, Supplier Part Number 1=MCP2542FDT-E/SNCT-ND, Voltage - Supply="4.5V ~ 5.5V", ComponentLink1Description=Datasheet, ComponentLink1URL=http://www.microchip.com/mymicrochip/filehandler.aspx?ddocname=en585412, ComponentLink2Description="DigiKey Link", ComponentLink2URL=http://digikey.com/product-detail/en/microchip-technology/MCP2542FDT-E-SN/MCP2542FDT-E-SNCT-ND/9642863, Data Rate=8Mbps, LastUpdated="2020-05-24 11:07:13 PM", Lifecycle Status=Active, Minimum Order=1, Mounting Type="Surface Mount", Number of Drivers/Receivers=1/1, Package / Case="8-SOIC (0.154\", 3.90mm Width)", Packaging=TapeAndReel, Part Number=MCP2542FDT-E/SN, Part Status=Active, Price=0.59, Protocol=CANbus, Receiver Hysteresis=200mV, Series=-, Supplier 1=DigiKey, Type=Transceiver
IC4: "IC MCU 32BIT 512KB FLASH 64LQFP", Device Package=64-LQFP, Manufacturer=STMicroelectronics, Supplier Device Package="64-LQFP (10x10)", Supplier Part Number 1=497-16775-ND, Voltage - Supply (Vcc/Vdd)="1.7V ~ 3.6V", ComponentLink1Description=Datasheet, ComponentLink1URL=http://www.st.com/content/ccc/resource/technical/document/datasheet/65/cb/75/50/53/d6/48/24/DM00141306.pdf/files/DM00141306.pdf/jcr:content/translations/en.DM00141306.pdf, ComponentLink2Description="DigiKey Link", ComponentLink2URL=http://digikey.com/product-detail/en/stmicroelectronics/STM32F446RET7/497-16775-ND/6207480, Connectivity="CANbus, EBI/EMI, I²C, IrDA, LINbus, SAI, SD, SPDIF-Rx, SPI, UART/USART, USB, USB OTG", Core Processor="ARM® Cortex®-M4", Core Size=32-Bit, Data Converters="A/D 16x12b; D/A 2x12b", LastUpdated="2020-08-30 9:03:14 PM", Lifecycle Status=Active, Minimum Order=1, Mounting Type="Surface Mount", Number of I/O=50, Oscillator Type=Internal, Package / Case=64-LQFP, Packaging=Tray, Part Number=STM32F446RET7, PartId=220, Peripherals="Brown-out Detect/Reset, DMA, I²S, LVD, POR, PWM, WDT", Price=8.42, Program Memory Size="512KB (512K x 8)", Program Memory Type=FLASH, RAM Size="128K x 8", Series=STM32F4, Speed=180MHz, Supplier 1=DigiKey
IC5: "IC TRNSLTR BIDIRECTIONAL 14SOIC", Part Number=TXB0104DR
J1 J2 J3 J4 J5 J6 J7 J8 J10 J12: "CONN HEADER R/A 2POS 2.54MM", Insulation Color=Black, Manufacturer=Molex, Material Flammability Rating="UL94 V-0", Operating temperature="-40°C ~ 105°C", Supplier Part Number 1=WM4153-ND, Voltage rating=250V, ComponentLink1Description=Datasheet, ComponentLink1URL=https://www.molex.com/pdm_docs/sd/705530106_sd.pdf, ComponentLink2Description="DigiKey Link", ComponentLink2URL=http://digikey.com/product-detail/en/molex/0705530106/WM4153-ND/1643386, Connector Type=Header, Contact Finish - Mating=Gold, Contact Finish - Post=Tin, Contact Finish Thickness - Mating="30.0µin (0.76µm)", Contact Length - Mating="0.240\" (6.10mm)", Contact Length - Post="0.130\" (3.30mm)", Contact material="Phosphor Bronze", Contact Shape=Square, Contact Type="Male Pin", Fastening Type="Latch Holder", Insulation Height="0.215\" (5.45mm)", Insulation Material="Polyester, Glass Filled", LastUpdated="2020-01-12 11:55:40 PM", Lifecycle Status=Active, Minimum Order=1, Mounting Type="Through Hole, Right Angle", Number of Positions=2, Number of Positions Loaded=All, Number of Rows=1, Packaging=Tube, Part Number=0705530106, Part Status=Active, PartId=85, Pitch - Mating="0.100\" (2.54mm)", Price=1.38, Series="SL 70553", Shrouding="Shrouded - 4 Wall", Style="Board to Cable/Wire", Supplier 1=DigiKey, Termination=Solder
J9: "CONN HEADER R/A 4POS 2.54MM", Insulation Color=Black, Manufacturer=Molex, Material Flammability Rating="UL94 V-0", Operating temperature="-40°C ~ 105°C", Supplier Part Number 1=WM4902-ND, Voltage rating=250V, ComponentLink1Description=Datasheet, ComponentLink1URL=https://www.molex.com/pdm_docs/sd/705530002_sd.pdf, ComponentLink2Description="DigiKey Link", ComponentLink2URL=http://digikey.com/product-detail/en/molex/0705530003/WM4902-ND/114959, Connector Type=Header, Contact Finish - Mating=Gold, Contact Finish - Post=Tin, Contact Finish Thickness - Mating="15.0µin (0.38µm)", Contact Length - Mating="0.240\" (6.10mm)", Contact Length - Post="0.130\" (3.30mm)", Contact material="Phosphor Bronze", Contact Shape=Square, Contact Type="Male Pin", Fastening Type="Latch Holder", Insulation Height="0.215\" (5.45mm)", Insulation Material="Polyester, Glass Filled", LastUpdated="2020-01-12 11:56:17 PM", Lifecycle Status=Active, Minimum Order=1, Mounting Type="Through Hole, Right Angle", Number of Positions=4, Number of Positions Loaded=All, Number of Rows=1, Packaging=Tube, Part Number=0705530003, Part Status=Active, PartId=87, Pitch - Mating="0.100\" (2.54mm)", Price=1.05, Series="SL 70553", Shrouding="Shrouded - 4 Wall", Style="Board to Cable/Wire", Supplier 1=DigiKey, Termination=Solder
J11: "CONN HEADER R/A 8POS 2.54MM", Part Number=0705530007
J13: "CONN HEADER R/A 3POS 2.54MM", Part Number=0705530002
J14 J15 J16: "CONN HEADER R/A 3POS 2.54MM", Insulation Color=Black, Manufacturer=Molex, Material Flammability Rating="UL94 V-0", Operating temperature="-40°C ~ 105°C", Supplier Part Number 1=WM4901-ND, Voltage rating=250V, ComponentLink1Description=Datasheet, ComponentLink1URL=https://www.molex.com/pdm_docs/sd/705530002_sd.pdf, ComponentLink2Description="DigiKey Link", ComponentLink2URL=http://digikey.com/product-detail/en/molex/0705530002/WM4901-ND/114955, Connector Type=Header, Contact Finish - Mating=Gold, Contact Finish - Post=Tin, Contact Finish Thickness - Mating="15.0µin (0.38µm)", Contact Length - Mating="0.240\" (6.10mm)", Contact Length - Post="0.130\" (3.30mm)", Contact material="Phosphor Bronze", Contact Shape=Square, Contact Type="Male Pin", Fastening Type="Latch Holder", Insulation Height="0.215\" (5.45mm)", Insulation Material="Polyester, Glass Filled", LastUpdated="2020-01-12 11:55:56 PM", Lifecycle Status=Active, Minimum Order=1, Mounting Type="Through Hole, Right Angle", Number of Positions=3, Number of Positions Loaded=All, Number of Rows=1, Packaging=Tube, Part Number=0705530002, Part Status=Active, PartId=86, Pitch - Mating="0.100\" (2.54mm)", Price=1.02, Series="SL 70553", Shrouding="Shrouded - 4 Wall", Style="Board to Cable/Wire", Supplier 1=DigiKey, Termination=Solder
R1 R2 R3 R4 R11: library part CPF0402B10KE1, "RES SMD 10K OHM 0.1% 1/16W 0402", Device Package="0402 (1005 Metric)", Manufacturer="TE Connectivity Passive Product", Operating temperature="-55°C ~ 155°C", Power (Watts)="0.063W, 1/16W", Supplier Device Package=0402, Supplier Part Number 1=A102579CT-ND, Temperature Coefficient=±25ppm/°C, Tolerance=±0.1%, ComponentLink1Description=Datasheet, ComponentLink1URL=https://www.te.com/commerce/DocumentDelivery/DDEController?Action=srchrtrv&DocNm=1773200&DocType=DS&DocLang=English, ComponentLink2Description="DigiKey Link", ComponentLink2URL=http://digikey.com/product-detail/en/te-connectivity-passive-product/CPF0402B10KE1/A102579CT-ND/2729112, Composition="Thin Film", Height - Seated (Max)="0.014\" (0.35mm)", LastUpdated="2020-09-02 1:07:41 AM", Lifecycle Status=Active, Minimum Order=1, Number of Terminations=2, Package / Case="0402 (1005 Metric)", Packaging=TapeAndReel, Part Number=CPF0402B10KE1, Part Status=Active, PartId=15889, Price=0.13, Resistance="10 kOhms", Series="CPF, Neohm", Size / Dimension="0.039\" L x 0.020\" W (1.00mm x 0.50mm)", Supplier 1=DigiKey
R5: library part CR0402-FX-1801GLF, "RES SMD 1.8K OHM 1% 1/16W 0402", Device Package="0402 (1005 Metric)", Manufacturer="Bourns Inc.", Operating temperature="-55°C ~ 155°C", Power (Watts)="0.063W, 1/16W", Supplier Device Package=0402, Supplier Part Number 1=CR0402-FX-1801GLFCT-ND, Temperature Coefficient=±100ppm/°C, Tolerance=±1%, ComponentLink1Description=Datasheet, ComponentLink1URL=https://www.bourns.com/docs/Product-Datasheets/CR0402.pdf, ComponentLink2Description="DigiKey Link", ComponentLink2URL=http://digikey.com/product-detail/en/bourns-inc/CR0402-FX-1801GLF/CR0402-FX-1801GLFCT-ND/8601850, Composition="Thick Film", Height - Seated (Max)="0.016\" (0.40mm)", LastUpdated="2020-09-02 1:07:48 AM", Lifecycle Status=Active, Minimum Order=1, Number of Terminations=2, Package / Case="0402 (1005 Metric)", Packaging=TapeAndReel, Part Number=CR0402-FX-1801GLF, Part Status=Active, PartId=12865, Price=0.01, Resistance="1.8 kOhms", Series=CR0402, Size / Dimension="0.039\" L x 0.020\" W (1.00mm x 0.50mm)", Supplier 1=DigiKey
R6: library part ERJ-2RKF3400X, "RES SMD 340 OHM 1% 1/10W 0402", Device Package="0402 (1005 Metric)", Manufacturer="Panasonic Electronic Components", Operating temperature="-55°C ~ 155°C", Power (Watts)="0.1W, 1/10W", Ratings=AEC-Q200, Supplier Device Package=0402, Supplier Part Number 1=P340LCT-ND, Temperature Coefficient=±100ppm/°C, Tolerance=±1%, ComponentLink1Description=Datasheet, ComponentLink1URL=https://industrial.panasonic.com/cdbs/www-data/pdf/RDA0000/AOA0000C304.pdf, ComponentLink2Description="DigiKey Link", ComponentLink2URL=http://digikey.com/product-detail/en/panasonic-electronic-components/ERJ-2RKF3400X/P340LCT-ND/194355, Composition="Thick Film", Features="Automotive AEC-Q200", Height - Seated (Max)="0.016\" (0.40mm)", LastUpdated="2020-09-02 1:07:26 AM", Lifecycle Status=Active, Minimum Order=1, Number of Terminations=2, Package / Case="0402 (1005 Metric)", Packaging=CutTape, Part Number=ERJ-2RKF3400X, Part Status=Active, PartId=21290, Price=0.10, Resistance="340 Ohms", Series=ERJ, Size / Dimension="0.039\" L x 0.020\" W (1.00mm x 0.50mm)", Supplier 1=DigiKey
R7 R10: library part CRGCQ0402J220R, "CRGCQ 0402 220R 5%", Device Package="0402 (1005 Metric)", Manufacturer="TE Connectivity Passive Product", Operating temperature="-55°C ~ 155°C", Power (Watts)="0.063W, 1/16W", Ratings=AEC-Q200, Supplier Device Package=0402, Supplier Part Number 1=A130044CT-ND, Temperature Coefficient=±100ppm/°C, Tolerance=±5%, ComponentLink1Description=Datasheet, ComponentLink1URL=https://www.te.com/commerce/DocumentDelivery/DDEController?Action=srchrtrv&DocNm=1773204-3&DocType=DS&DocLang=English, ComponentLink2Description="DigiKey Link", ComponentLink2URL=http://digikey.com/product-detail/en/te-connectivity-passive-product/CRGCQ0402J220R/A130044CT-ND/8577876, Composition="Thick Film", Features="Automotive AEC-Q200, Moisture Resistant", Height - Seated (Max)="0.016\" (0.40mm)", LastUpdated="2020-09-02 1:07:58 AM", Lifecycle Status=Active, Minimum Order=1, Number of Terminations=2, Package / Case="0402 (1005 Metric)", Packaging=CutTape, Part Number=CRGCQ0402J220R, Part Status=Active, PartId=8030, Price=0.10, Resistance="220 Ohms", Series=CRGCQ, Size / Dimension="0.039\" L x 0.020\" W (1.00mm x 0.50mm)", Supplier 1=DigiKey
R8: library part RC0402JR-07120RL, "RES SMD 120 OHM 5% 1/16W 0402", Device Package="0402 (1005 Metric)", Manufacturer=Yageo, Operating temperature="-55°C ~ 155°C", Power (Watts)="0.063W, 1/16W", Supplier Device Package=0402, Supplier Part Number 1=311-120JRCT-ND, Temperature Coefficient=±100ppm/°C, Tolerance=±5%, ComponentLink1Description=Datasheet, ComponentLink1URL=https://www.yageo.com/upload/media/product/productsearch/datasheet/rchip/PYu-RC_Group_51_RoHS_L_10.pdf, ComponentLink2Description="DigiKey Link", ComponentLink2URL=http://digikey.com/product-detail/en/yageo/RC0402JR-07120RL/311-120JRCT-ND/2827967, Composition="Thick Film", Features="Moisture Resistant", Height - Seated (Max)="0.016\" (0.40mm)", LastUpdated="2020-09-02 1:08:05 AM", Lifecycle Status=Active, Minimum Order=1, Number of Terminations=2, Package / Case="0402 (1005 Metric)", Packaging=CutTape, Part Number=RC0402JR-07120RL, Part Status=Active, PartId=4797, Price=0.10, Resistance="120 Ohms", Series=RC, Size / Dimension="0.039\" L x 0.020\" W (1.00mm x 0.50mm)", Supplier 1=DigiKey
R9: library part CRCW040210K0DHEDP, "RES SMD 10K OHM 0.5% 1/16W 0402", Device Package="0402 (1005 Metric)", Manufacturer="Vishay Dale", Operating temperature="-55°C ~ 155°C", Power (Watts)="0.063W, 1/16W", Ratings=AEC-Q200, Supplier Device Package=0402, Supplier Part Number 1=541-10KAVCT-ND, Temperature Coefficient=±50ppm/°C, Tolerance=±0.5%, ComponentLink1Description=Datasheet, ComponentLink1URL=http://www.vishay.com/docs/20036/dcrcwpe3.pdf, ComponentLink2Description="DigiKey Link", ComponentLink2URL=http://digikey.com/product-detail/en/vishay-dale/CRCW040210K0DHEDP/541-10KAVCT-ND/3593906, Composition="Thick Film", Features="Automotive AEC-Q200", Height - Seated (Max)="0.016\" (0.40mm)", LastUpdated="2020-09-02 1:08:05 AM", Lifecycle Status=Active, Minimum Order=1, Number of Terminations=2, Package / Case="0402 (1005 Metric)", Packaging=TapeAndReel, Part Number=CRCW040210K0DHEDP, Part Status=Active, PartId=5057, Price=0.03, Resistance="10 kOhms", Series=CRCW-P, Size / Dimension="0.039\" L x 0.020\" W (1.00mm x 0.50mm)", Supplier 1=DigiKey
R12: library part RCS0402470RFKED, "RES SMD 470 OHM 1% 1/5W 0402", Device Package="0402 (1005 Metric)", Manufacturer="Vishay Dale", Operating temperature="-55°C ~ 155°C", Power (Watts)="0.2W, 1/5W", Ratings=AEC-Q200, Supplier Device Package=0402, Supplier Part Number 1=541-10412-1-ND, Temperature Coefficient=±100ppm/°C, Tolerance=±1%, ComponentLink1Description=Datasheet, ComponentLink1URL=http://www.vishay.com/docs/20065/rcse3.pdf, ComponentLink2Description="DigiKey Link", ComponentLink2URL=http://digikey.com/product-detail/en/vishay-dale/RCS0402470RFKED/541-10412-1-ND/10059778, Composition="Thick Film", Features="Automotive AEC-Q200, Pulse Withstanding", Height - Seated (Max)="0.016\" (0.40mm)", LastUpdated="2020-09-02 1:08:02 AM", Lifecycle Status=Active, Minimum Order=1, Number of Terminations=2, Package / Case="0402 (1005 Metric)", Packaging=TapeAndReel, Part Number=RCS0402470RFKED, Part Status=Active, PartId=6043, Price=0.01, Resistance="470 Ohms", Series="RCS e3", Size / Dimension="0.039\" L x 0.020\" W (1.00mm x 0.50mm)", Supplier 1=DigiKey
S1: "SWITCH TACTILE SPST-NO 0.02A 15V", Contact Rating @ Voltage="0.02A @ 15VDC", Manufacturer=C&K, Operating Force=330gf, Operating temperature="-40°C ~ 85°C", Supplier Part Number 1=CKN10781CT-ND, Actuator Height off PCB, Vertical=0.60mm, Actuator Orientation="Top Actuated", Actuator Type=Standard, Circuit=SPST-NO, ComponentLink1Description=Datasheet, ComponentLink1URL=https://dznh3ojzb2azq.cloudfront.net/products/Tactile/KXT3/documents/datasheet.pdf, ComponentLink2Description="DigiKey Link", ComponentLink2URL=http://digikey.com/product-detail/en/c-k/KXT341-LHS/CKN10781CT-ND/6607324, Illumination=Non-Illuminated, LastUpdated="2020-09-02 1:27:07 AM", Lifecycle Status=Active, Minimum Order=1, Mounting Type="Surface Mount", Outline="3.00mm x 2.00mm", Packaging=TapeAndReel, Part Number="KXT341 LHS", Part Status=Active, Price=0.14, Series=KXT3, Supplier 1=DigiKey, Switch Function=Off-Mom, Termination Style="SMD (SMT) Tab"
S2: "SWITCH SLIDE SPDT 0.4VA 28V", Current Rating (Amps)="0.4VA (AC/DC)", Manufacturer="NKK Switches", Operating temperature="-25°C ~ 85°C", Supplier Part Number 1=360-3250-ND, Voltage Rating - AC=28V, Actuator Length=2.00mm, Actuator Type=Standard, Circuit=SPDT, ComponentLink1Description=Datasheet, ComponentLink1URL=http://www.nkkswitches.com/pdf/SS3surfaceMount-1.pdf, ComponentLink2Description="DigiKey Link", ComponentLink2URL=http://digikey.com/product-detail/en/nkk-switches/SS312SAH4/360-3250-ND/1052031, Contact Finish=Gold, Contact material="Phosphor Bronze", Contact Timing="Shorting (MBB)", LastUpdated="2020-01-04 7:15:23 PM", Lifecycle Status=Active, Minimum Order=1, Mounting Type="Surface Mount, Right Angle", Packaging=Tray, Part Number=SS312SAH4, Part Status=Active, PartId=2, Price=3.02, Series=SS3, Supplier 1=DigiKey, Switch Function=On-On, Termination Style="Gull Wing", Voltage Rating - DC=28V
Y1: library part NX3225GD-8MHZ-STD-CRA-3, "CRYSTAL 8.0000MHZ 8PF SMD", ESR (Equivalent Series Resistance)="500 Ohms", Frequency Stability=±150ppm, Frequency Tolerance=±50ppm, Load Capacitance=8pF, Manufacturer="NDK America, Inc.", Operating Mode=Fundamental, Operating temperature="-40°C ~ 150°C", Package / Case="2-SMD, No Lead", Ratings=AEC-Q200, Supplier Part Number 1=644-1178-1-ND, ComponentLink1Description=Datasheet, ComponentLink1URL=http://www.ndk.com/images/products/catalog/c_NX3225GD-STD-CRA-3_e.pdf, ComponentLink2Description="DigiKey Link", ComponentLink2URL=http://digikey.com/product-detail/en/ndk-america-inc/NX3225GD-8MHZ-STD-CRA-3/644-1178-1-ND/3125567, Frequency=8MHz, Height - Seated (Max)="0.039\" (1.00mm)", LastUpdated="2020-09-02 1:25:56 AM", Lifecycle Status=Active, Minimum Order=1, Mounting Type="Surface Mount", Packaging=TapeAndReel, Part Number=NX3225GD-8MHZ-STD-CRA-3, Part Status=Active, PartId=744, Price=0.48, Series=NX3225GD, Size / Dimension="0.126\" L x 0.098\" W (3.20mm x 2.50mm)", Supplier 1=DigiKey, Type="MHz Crystal"

## Free pads (board coordinates)
  round 1.524 hole 3.556 unplated: 2(3.511,10.942) 2(3.511,56.241) 2(116.967,10.941) 2(117.012,56.242)

## Via types
v1: diameter 0.508, hole 0.254, Top Layer to Bottom Layer, 57 vias
v2: diameter 0.6, hole 0.3, Top Layer to Bottom Layer, 22 vias

## Nets (pads, with @x,y where several pads share a name; then routed paths per layer and width w, separated by ;. In a path a pad name is that pad's centre, name@x,y a point inside that pad or via, vN(x,y) a via of type N, cw(c..) or ccw(c..) an arc to the next point about the centre after c; other vN are vias at no path point)
BOOT0: IC4.60 R9.2 | length 1.8
  Bottom Layer w0.3: R9.2 49.657,36.446 49.756,36.347 IC4.60